# Altium PCB IMX425_MB.PcbDoc
Units mm, origin at the board's own origin, x right, y up, seen from the top; angles counter-clockwise.
Board outline 185 x 150 mm, 2 copper layers (Top Layer, Bottom Layer); 74 components, 34 nets, 348 pads, 590 vias.
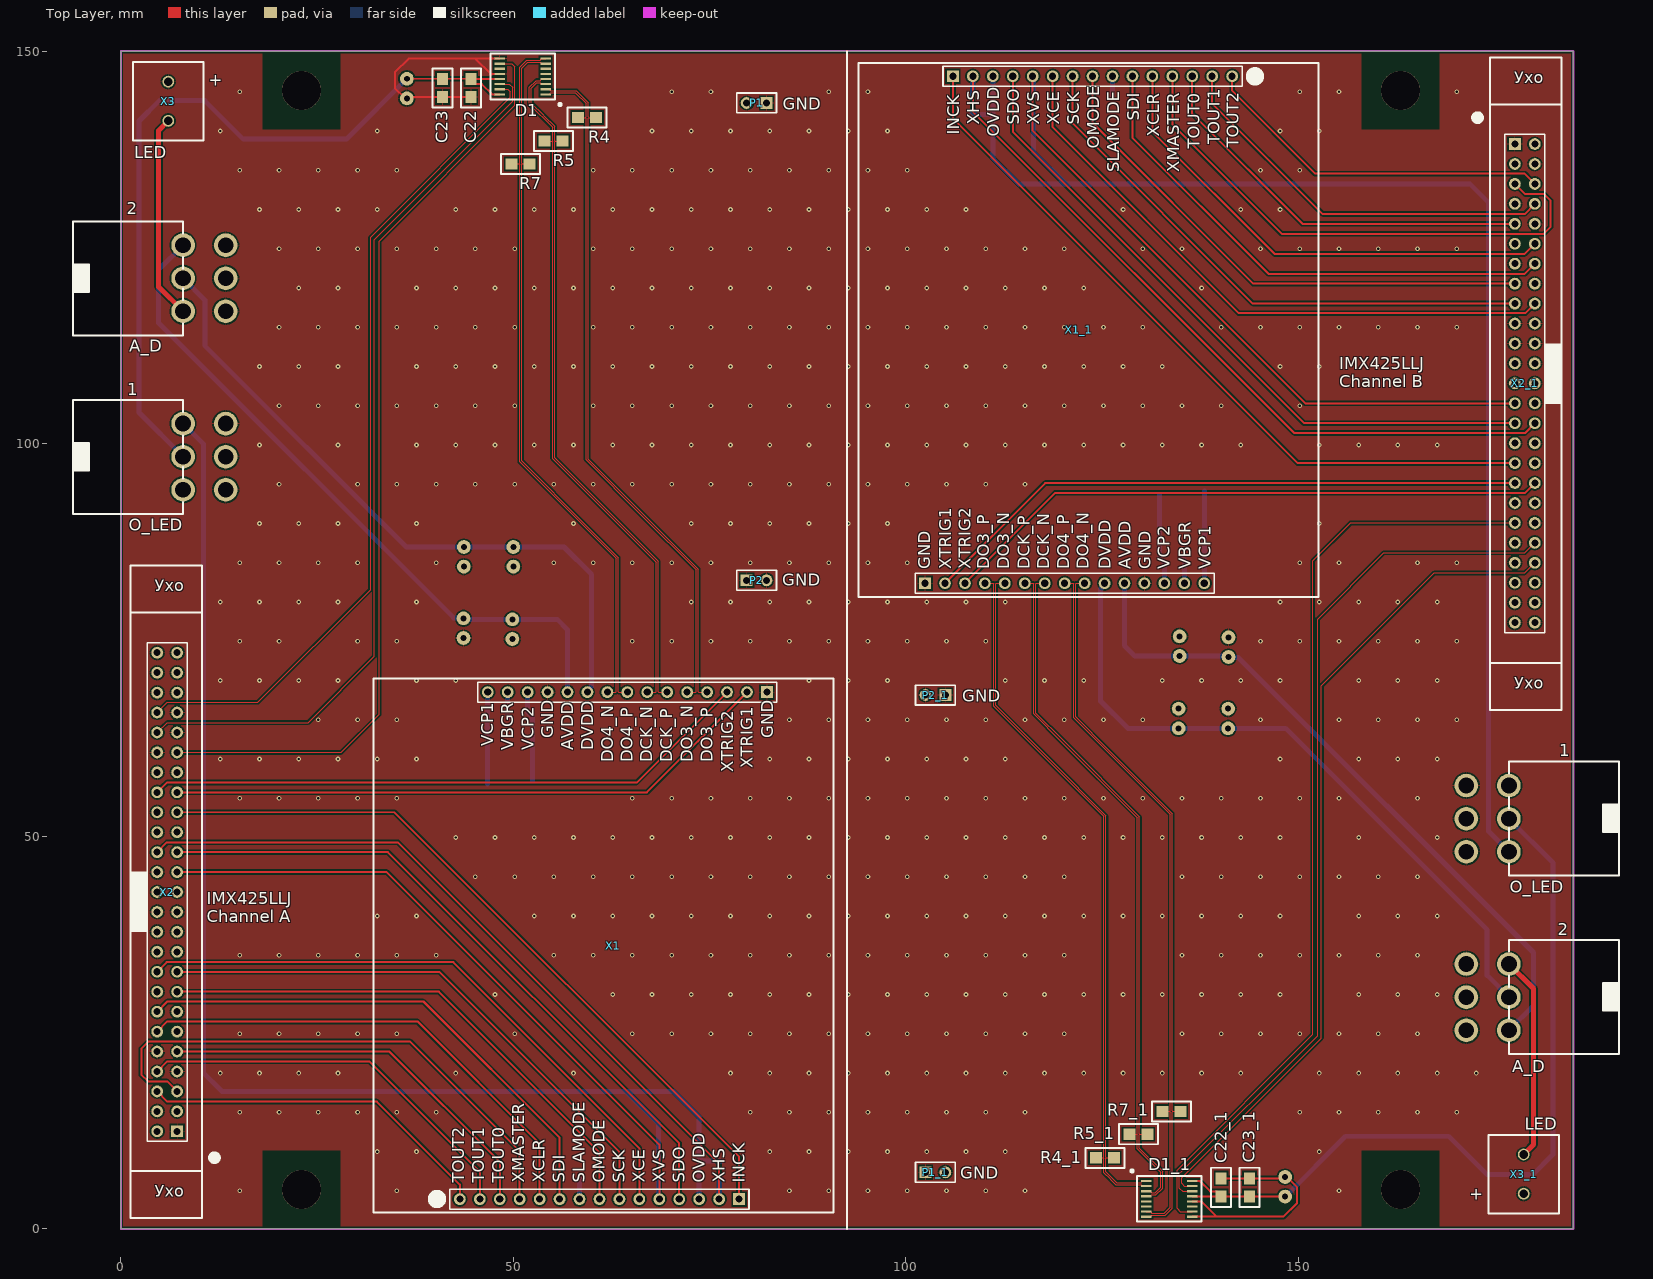
[diagram p0: Top Layer view]
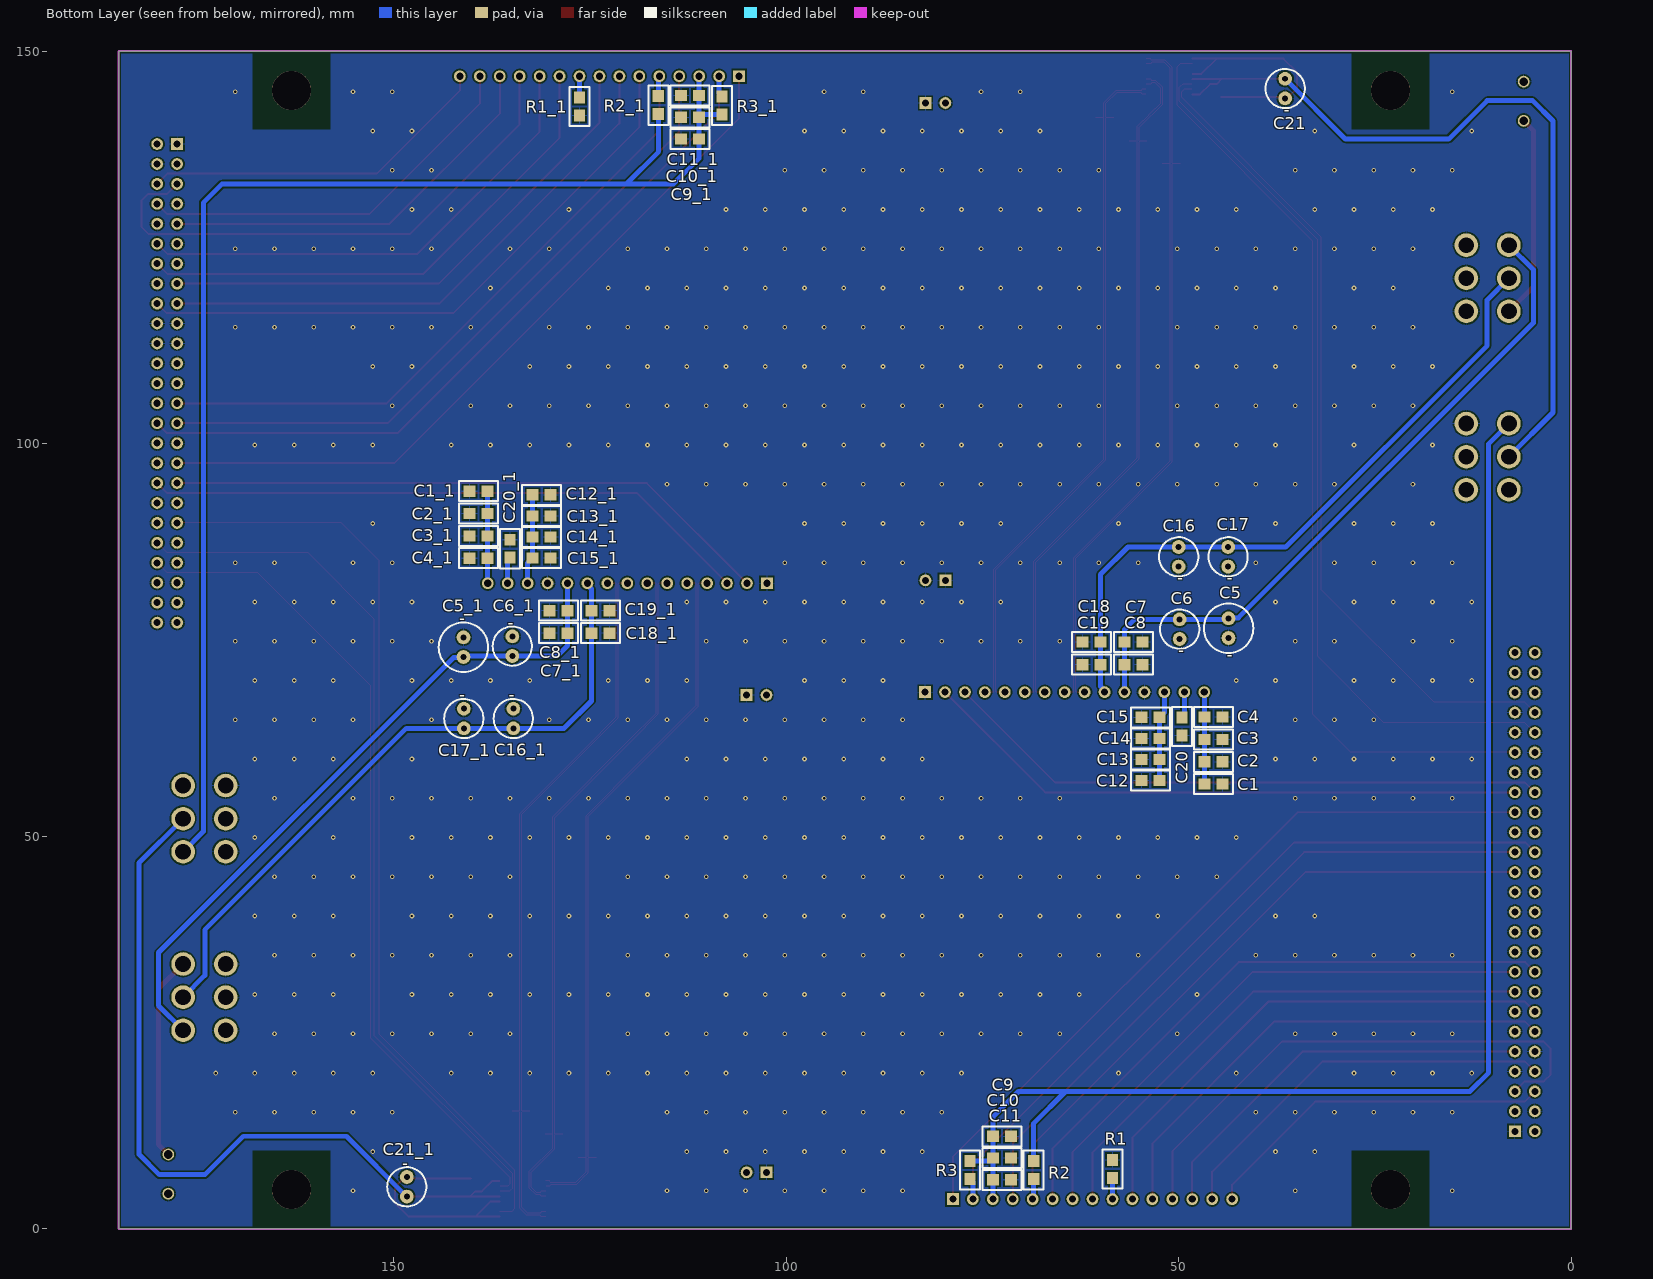
[diagram p1: Bottom Layer view, seen from below]

## Layer stack, top to bottom
Top Solder: solder mask 0.0102, Solder Resist, Dk 3.5
Top Layer: signal copper 0.0356
Dielectric 1: dielectric 0.32, FR-4, Dk 4.8
Bottom Layer: signal copper 0.0356
Bottom Solder: solder mask 0.0102, Solder Resist, Dk 3.5

## Board outline
0,0 0,150 185,150 185,0

## Design rules (kind name [scope] priority, off if disabled: settings)
BoardOutlineClearance [OnLayer('Multi-Layer')] p1: gap=0.254 ignorepadtopadclearanceinfootprint=FALSE except(0: Arc-SplitContinuation Track-SplitContinuation SMDPad-SplitContinuation THPad-SplitContinuation Via-SplitContinuation Fill-SplitContinuation Poly-SplitContinuation Region-SplitContinuation Text-SplitContinuation; 0.4: Arc-OutlineEdge Track-OutlineEdge SMDPad-OutlineEdge THPad-OutlineEdge Via-OutlineEdge Fill-OutlineEdge Poly-OutlineEdge Region-OutlineEdge Text-OutlineEdge)
Clearance [All] p1: gap=0.125 ignorepadtopadclearanceinfootprint=FALSE except(0.2: Arc-Fill Arc-Poly Track-Fill Track-Poly SMDPad-Fill SMDPad-Poly THPad-Fill THPad-Poly Via-Fill Via-Poly Fill-Fill Fill-Poly Poly-Poly Poly-Region Poly-Text; 0.25: Arc-Hole Track-Hole SMDPad-Hole THPad-Hole Via-Hole Fill-Hole Poly-Hole Region-Hole Text-Hole) // Standart
DiffPairsRouting [All] p1: maxlimit=0.254 minlimit=0.127 mostfreqgap=0.13 toplayer_minwidth=0.127 toplayer_maxwidth=0.381 toplayer_prefwidth=0.37 bottomlayer_minwidth=0.127 bottomlayer_maxwidth=0.381 bottomlayer_prefwidth=0.37 maxuncoupledlength=12.7
HoleSize [All] p1: absolutevalues=TRUE maxlimit=5 minlimit=0.3 maxpercent=80.000 minpercent=20.000
MinimumSolderMaskSliver [All] p1: minsoldermaskwidth=0.1
PlaneClearance "PlaneClearance-1 1/2 Oz" [All] p1: clearance=0.2 // Standart
PlaneConnect "TermalConnect-1 1/2 Oz" [All] p1: planeconnectstyle=Relief reliefexpansion=0.2 reliefentries=4 reliefconductorwidth=0.2 reliefairgap=0.2 // Standart
PolygonConnect "PolygonConnect-1 1/2 Oz" [All] p1: thpad.connectstyle=Relief thpad.reliefconductorwidth=0.15 thpad.reliefentries=4 thpad.polygonreliefangle="90 Angle" thpad.airgapwidth=0.2 smdpad.connectstyle=Relief smdpad.reliefconductorwidth=0.2 smdpad.reliefentries=4 smdpad.polygonreliefangle="90 Angle" smdpad.airgapwidth=0.2 via.connectstyle=Direct via.reliefconductorwidth=0.254 via.reliefentries=4 via.polygonreliefangle="90 Angle" via.airgapwidth=0.254 // Standart
RoutingVias [All] p1: holewidth=0.3 width=1.27 viastyle="Through Hole" minholewidth=0.3 minwidth=0.6 maxholewidth=0.711 maxwidth=1.27
SilkToSilkClearance [All] p1: silktosilkclearance=0
SilkToSolderMaskClearance [IsPad] p1: minsilkscreentomaskgap=0 clearancetoexposedcopper=TRUE
SolderMaskExpansion [All] p1: expansion=0.102 istentingtop=FALSE
UnRoutedNet [All] p1: checkbadconnections=TRUE
Width [All] p1: maxlimit=2.5 minlimit=0.125 preferedwidth=0.37
22 further rules are at their usual default settings.

## Classes and differential pairs
component class IMX425_MB: 1 2 C1 C2 C3 C4 C5 C6 C7 C8 C9 C10 C11 C12 C13 C14 C15 C16 C17 C18 C19 C20 C21 C22 C23 D1 P1 P2 R1 R2 R3 R4 R5 R7 X1 X2 X3
differential pair DO4: +DO4_P -DO4_N
differential pair DO3: +DO3_P -DO3_N
differential pair DCK: +DCK_P -DCK_N

## Components (designator, comment, footprint, x,y, rotation, side; value= is the part's Value field where it differs from the comment)
1 "O_LED" POWER 176.797,48.028 r270 top
1 "O_LED" POWER 7.925,102.565 r90 top
2 "A_D" POWER 176.797,25.295 r270 top
2 "A_D" POWER 7.925,125.298 r90 top
C1 "4,7 мкФ" CAP_SMALL 48.057,55.372 r180 bottom
C1_1 "4,7 мкФ" CAP_SMALL 136.665,95.221 r0 bottom (schematic designator C1)
C2 "4,7 мкФ" CAP_SMALL 48.057,58.217 r180 bottom
C2_1 "4,7 мкФ" CAP_SMALL 136.665,92.376 r0 bottom (schematic designator C2)
C3 "4,7 мкФ" CAP_SMALL 48.057,61.062 r180 bottom
C3_1 "4,7 мкФ" CAP_SMALL 136.665,89.531 r0 bottom (schematic designator C3)
C4 "4,7 мкФ" CAP_SMALL 48.057,63.906 r180 bottom
C4_1 "4,7 мкФ" CAP_SMALL 136.665,86.686 r0 bottom (schematic designator C4)
C5 "100 мкФ" Cap_0612_electrolitic 43.637,76.505 r270 bottom
C5_1 "100 мкФ" Cap_0612_electrolitic 141.085,74.088 r90 bottom (schematic designator C5)
C6 "22 мкФ" Cap_0511_electrolitic 49.86,76.378 r270 bottom
C6_1 "22 мкФ" Cap_0511_electrolitic 134.862,74.215 r90 bottom (schematic designator C6)
C7 "0,1 мкФ" CAP_SMALL 58.242,73.457 r180 bottom
C7_1 "0,1 мкФ" CAP_SMALL 126.48,77.136 r0 bottom (schematic designator C7)
C8 "0,01 мкФ" CAP_SMALL 58.242,70.587 r180 bottom
C8_1 "0,01 мкФ" CAP_SMALL 126.48,80.006 r0 bottom (schematic designator C8)
C9 "1 мкФ" CAP_SMALL 75.006,10.516 r180 bottom
C9_1 "1 мкФ" CAP_SMALL 109.716,140.077 r0 bottom (schematic designator C9)
C10 "0,1 мкФ" CAP_SMALL 75.006,7.747 r180 bottom
C10_1 "0,1 мкФ" CAP_SMALL 109.716,142.846 r0 bottom (schematic designator C10)
C11 "0,01 мкФ" CAP_SMALL 75.006,4.978 r180 bottom
C11_1 "0,01 мкФ" CAP_SMALL 109.716,145.614 r0 bottom (schematic designator C11)
C12 "4,7 мкФ" CAP_SMALL 51.079,58.369 r0 bottom
C12_1 "4,7 мкФ" CAP_SMALL 133.642,92.224 r180 bottom (schematic designator C12)
C13 "4,7 мкФ" CAP_SMALL 51.079,61.053 r0 bottom
C13_1 "4,7 мкФ" CAP_SMALL 133.642,89.54 r180 bottom (schematic designator C13)
C14 "4,7 мкФ" CAP_SMALL 51.079,63.737 r0 bottom
C14_1 "4,7 мкФ" CAP_SMALL 133.642,86.856 r180 bottom (schematic designator C14)
C15 "4,7 мкФ" CAP_SMALL 51.079,66.421 r0 bottom
C15_1 "4,7 мкФ" CAP_SMALL 133.642,84.172 r180 bottom (schematic designator C15)
C16 "22 мкФ" Cap_0511_electrolitic 49.987,85.598 r270 bottom
C16_1 "22 мкФ" Cap_0511_electrolitic 134.735,64.995 r90 bottom (schematic designator C16)
C17 "22 мкФ" Cap_0511_electrolitic 43.688,85.598 r270 bottom
C17_1 "22 мкФ" Cap_0511_electrolitic 141.034,64.995 r90 bottom (schematic designator C17)
C18 "0,1 мкФ" CAP_SMALL 58.572,75.997 r0 bottom
C18_1 "0,1 мкФ" CAP_SMALL 126.149,74.596 r180 bottom (schematic designator C18)
C19 "0,01 мкФ" CAP_SMALL 58.572,73.127 r0 bottom
C19_1 "0,01 мкФ" CAP_SMALL 126.149,77.466 r180 bottom (schematic designator C19)
C20 "0,22 мкФ" CAP_SMALL 50.851,66.472 r270 bottom
C20_1 "0,22 мкФ" CAP_SMALL 133.871,84.121 r90 bottom (schematic designator C20)
C21 "22 мкФ" Cap_0511_electrolitic 36.424,145.237 r270 bottom
C21_1 "22 мкФ" Cap_0511_electrolitic 148.298,5.356 r90 bottom (schematic designator C21)
C22 "0,1 мкФ" CAP_SMALL 45.847,142.799 r90 top
C22_1 "0,1 мкФ" CAP_SMALL 138.875,7.794 r270 top (schematic designator C22)
C23 "0,01 мкФ" CAP_SMALL 42.24,142.799 r90 top
C23_1 "0,01 мкФ" CAP_SMALL 142.482,7.794 r270 top (schematic designator C23)
D1 "SN65LVDS048A" "SN65LVDS048A (4LVDS)" 54.1,144.5 r90 top
D1_1 "SN65LVDS048A" "SN65LVDS048A (4LVDS)" 130.622,6.093 r270 top (schematic designator D1)
P1 "GND" HDR1X2 82.24,143.4 r180 top
P1_1 "GND" HDR1X2 102.482,7.193 r0 top (schematic designator P1)
P2 "GND" HDR1X2 79.7,82.6 r0 top
P2_1 "GND" HDR1X2 105.022,67.993 r180 top (schematic designator P2)
R1 "10к" RES 59.665,5.156 r180 bottom
R1_1 "10к" RES 125.057,145.437 r0 bottom (schematic designator R1)
R2 "10к" RES 67.208,9.957 r0 bottom
R2_1 "10к" RES 117.513,140.636 r180 bottom (schematic designator R2)
R3 "10к" RES 75.311,9.982 r0 bottom
R3_1 "10к" RES 109.411,140.611 r180 bottom (schematic designator R3)
R4 "100" RES 56.9,142.789 r270 top
R4_1 "100" RES 127.822,7.804 r90 top (schematic designator R4)
R5 "100" RES 57.6,137.3 r90 top
R5_1 "100" RES 127.122,13.293 r270 top (schematic designator R5)
R7 "100" RES 53.4,134.4 r90 top
R7_1 "100" RES 131.322,16.193 r270 top (schematic designator R7)
X1 "IMX425LLJ" IMX425LLJ_MEZ 43.18,3.785 r90 top
X1_1 "IMX425LLJ" IMX425LLJ_MEZ 141.542,146.808 r270 top (schematic designator X1)
X2 "IDC_7953" IDC_7953 7.163,12.421 r90 top
X2_1 "IDC_7953" IDC_7953 177.559,138.172 r270 top (schematic designator X2)
X3 "LED" KLEMMNIK_2 6.045,141.122 r90 top
X3_1 "LED" KLEMMNIK_2 178.677,9.47 r270 top (schematic designator X3)

## Footprints (in the part's own frame and the unit in brackets; to place one, negate y for a bottom-side part, rotate by r counter-clockwise, add the part's x,y. Pads: shape width x height; smd on the part's side, far side on the other; paste and mask are expansions set on the pad)
Cap_0511_electrolitic [mm]
  round 1.75 hole 0.762: 1(-1.25,0) 2(1.25,0)
  silkscreen extent -2.5,-2.5 2.5,2.5
Cap_0612_electrolitic [mm]
  round 1.75 hole 0.762: 1(-1.25,0) 2(1.25,0)
  silkscreen extent -3.15,-3.15 3.15,3.15
CAP_SMALL [mil] "FROM_MAX"
  rect 60x55.98 smd: 1(53.71,50) 2(143.71,50)
  silkscreen extent 1,0 197,100, body extent 20,18 178,82, height 100
HDR1X2 [mm] "Connector; Header; 2 Position"
  rect 1.5x1.5 hole 0.9: 1(0,0)
  round 1.5 hole 0.9: 2(2.54,0)
  silkscreen extent -1.27,-1.27 3.81,1.27
IDC_7953 [mm]
  rect 1.5x1.5 hole 0.9: 1(0,0)
  round 1.5 hole 0.9: 2(0,2.54) 3(2.54,0) 4(2.54,2.54) 5(5.08,0) 6(5.08,2.54) 7(7.62,0) 8(7.62,2.54) 9(10.16,0) 10(10.16,2.54) 11(12.7,0) 12(12.7,2.54) 13(15.24,0) 14(15.24,2.54) 15(17.78,0) 16(17.78,2.54) 17(20.32,0) 18(20.32,2.54) 19(22.86,0) 20(22.86,2.54) 21(25.4,0) 22(25.4,2.54) 23(27.94,0) 24(27.94,2.54) 25(30.48,0) 26(30.48,2.54) 27(33.02,0) 28(33.02,2.54) 29(35.56,0) 30(35.56,2.54) 31(38.1,0) 32(38.1,2.54) 33(40.64,0) 34(40.64,2.54) 35(43.18,0) 36(43.18,2.54) 37(45.72,0) 38(45.72,2.54) 39(48.26,0) 40(48.26,2.54) 41(50.8,0) 42(50.8,2.54) 43(53.34,0) 44(53.34,2.54) 45(55.88,0) 46(55.88,2.54) 47(58.42,0) 48(58.42,2.54) 49(60.96,0) 50(60.96,2.54)
  silkscreen extent -11.03,-5.14 72.07,5.92
IMX425LLJ_MEZ [mm]
  round 1.5 hole 0.9: 1(0,0) 2(0,-2.54) 3(0,-5.08) 4(0,-7.62) 5(0,-10.16) 6(0,-12.7) 7(0,-15.24) 8(0,-17.78) 9(0,-20.32) 10(0,-22.86) 11(0,-25.4) 12(0,-27.94) 13(0,-30.48) 14(0,-33.02) 17(64.58,-36.568) 18(64.58,-34.028) 19(64.58,-31.488) 20(64.58,-28.948) 21(64.58,-26.408) 22(64.58,-23.868) 23(64.58,-21.328) 24(64.58,-18.788) 25(64.58,-16.248) 26(64.58,-13.708) 27(64.58,-11.168) 28(64.58,-8.628) 29(64.58,-6.088) 30(64.58,-3.548)
  rect 1.5x1.5 hole 0.9: 15(0,-35.56) 16(64.58,-39.108)
  silkscreen extent -1.7,-47.6 66.3,11
KLEMMNIK_2 [mm]
  round 1.5 hole 1.1: 1(0,0) 2(5,0)
  silkscreen extent -2.5,-4.5 7.5,4.5
POWER [mm] "POWER"
  round 3 hole 2: 1(0,0) 2(-4.217,0) 3(-8.435,0) 4(-8.435,-5.422) 5(-4.217,-5.422) 6(0,-5.422)
  silkscreen extent -11.5,0 3,14
RES [mil] "FROM_MAX"
  rect 55.98x60 smd: 1(49,52.71) 2(49,142.71)
  silkscreen extent -1,0 99,196, body extent 17,19 81,177, height 100
"SN65LVDS048A (4LVDS)" [mm]
  rect 0.28x1.35 smd: 1(0,0) 2(0.65,0) 3(1.3,0) 4(1.95,0) 5(2.6,0) 6(3.25,0) 7(3.9,0) 8(4.55,0) 9(4.55,5.85) 10(3.9,5.85) 11(3.25,5.85) 12(2.6,5.85) 13(1.95,5.85) 14(1.3,5.85) 15(0.65,5.85) 16(0,5.85)
  silkscreen extent -1.49,-2.03 5.18,7

## Part data
1 1 2 2: library part POWER
C1 C1_1 C2 C2_1 C3 C3_1 C4 C4_1 C7 C7_1 C8 C8_1 C9 C9_1 C10 C10_1 C11 C11_1 C12 C12_1 C13 C13_1 C14 C14_1 C15 C15_1 C18 C18_1 C19 C19_1 C20 C20_1 C22 C22_1 C23 C23_1: library part CAP_SMALL
C5 C5_1: library part Cap_electrolotoc_0612
C6 C6_1 C16 C16_1 C17 C17_1 C21 C21_1: library part Cap_electrolotoc_0511
D1 D1_1: library part "SN65LVDS048A (4LVDS)"
P1 P1_1 P2 P2_1: library part "Header 2", "Header, 2-Pin", LatestRevisionDate=17-Jul-2002, LatestRevisionNote="Re-released for DXP Platform.", Publisher="Altium Limited"
R1 R1_1 R2 R2_1 R3 R3_1 R4 R4_1 R5 R5_1 R7 R7_1: library part RES
X1 X1_1: library part IMX425LLJ_MEZ
X3 X3_1: library part KLEMMNIK_2

## Free pads (board coordinates)
  round 5 hole 5 unplated: H(23,5) H(23,145) H(163,5) H(163,145)

## Via types
v1: diameter 0.6, hole 0.3, Top Layer to Bottom Layer, 590 vias

## Nets (pads, with @x,y where several pads share a name; then routed paths per layer and width w, separated by ;. In a path a pad name is that pad's centre, name@x,y a point inside that pad or via, vN(x,y) a via of type N, cw(c..) or ccw(c..) an arc to the next point about the centre after c; other vN are vias at no path point)
3,3V_LVDS: 1.2@7.925,98.348 C21.1 C22.2 C23.2 D1.13 D1.16 | length 101.8
  Top Layer w0.254: C21.1 44.539,146.487 C22.2 ; D1.16 47.3,144.5 45.986,145.814 45.161,145.814 44.577,146.398 C22.2 ; D1.13 48.249,146.449 C22.2
  Bottom Layer w0.635: 1.2@7.925,98.348 2.3,103.973 2.3,141.1 4.9,143.7 10.7,143.7 15.6,138.8 28.736,138.8 C21.1
AVDD: 2.1@7.925,125.298 C5.1 C6.1 C7.1 C8.1 X1.26 | length 87.4
  Bottom Layer w0.635: 2.1@7.925,125.298 4.8,122.173 4.8,115.4 42.384,77.816 43.576,77.816 43.764,77.628 C6.1 55.572,77.628 56.878,76.322 C7.1 C8.1 56.878,68.374 X1.26
DCK: D1.14 X2.42 | length 113.3
  Top Layer w0.127: X2.42 5.893,64.491 23.851,64.491 32.3,72.94 32.3,126 49.9,143.6 49.9,145.4 49.5,145.8 D1.14
DCK_N: D1.4 R5.2 X1.22 | length 88.3
  Top Layer w0.127: R5.2 54.915,138.545 ; D1.4 53.565,146.45 53.488,146.373 53.488,146.328 53.414,146.253 52.89,146.253 52.043,145.406 52.043,143.257 54.99,140.31 54.99,138.619 54.915,138.545 ; X1.22 68.115,68.364 68.19,68.439 68.19,84.911 64.709,88.391 54.99,98.11 54.99,138.47 54.915,138.545
DCK_P: D1.3 R5.1 X1.21 | length 87.9
  Top Layer w0.127: D1.3 53.565,145.8 53.488,145.877 53.488,145.922 53.414,145.996 52.996,145.996 52.3,145.3 52.3,143.363 53.791,141.873 53.882,141.782 55.247,140.417 55.247,138.619 55.321,138.545 ; R5.1 55.321,138.545 ; X1.21 68.521,68.364 68.447,68.439 68.447,85.017 64.982,88.482 55.247,98.217 55.247,138.47 55.321,138.545
DO3: D1.15 X2.44 | length 105.9
  Top Layer w0.127: X2.44@4.61,65.773 5.893,67.056 17.449,67.056 31.8,81.407 31.8,126.3 49.6,144.1 49.6,144.8 49.25,145.15 D1.15
DO3_N: D1.1 R4.1 X1.20 | length 88.7
  Top Layer w0.127: D1.1 54.635,144.5 54.712,144.577 54.712,144.622 54.786,144.697 57.904,144.697 59.253,143.347 59.253,141.619 59.179,141.545 ; R4.1 59.179,141.545 ; X1.20 73.195,68.364 73.27,68.439 73.27,83.931 66.309,90.891 59.253,97.947 59.253,141.47 59.179,141.545
DO3_P: D1.2 R4.2 X1.19 | length 89.1
  Top Layer w0.127: D1.2 54.635,145.15 54.711,145.073 54.711,145.028 54.786,144.954 58.01,144.954 58.691,144.273 58.782,144.182 59.51,143.453 59.51,141.619 59.585,141.545 ; R4.2 59.585,141.545 ; X1.19 73.601,68.364 73.527,68.439 73.527,84.037 66.582,90.982 59.51,98.053 59.51,141.47 59.585,141.545
DO4: D1.10 X2.39 | length 119.5
  Top Layer w0.127: X2.39 28.067,60.681 32.9,65.514 32.9,125.8 50.2,143.1 50.2,148 49.8,148.4 D1.10
DO4_N: D1.8 R7.2 X1.24 | length 90.6
  Top Layer w0.127: R7.2 50.715,135.645 ; D1.8 53.565,149.05 53.489,148.974 53.489,148.928 53.414,148.854 51.69,148.854 50.79,147.953 50.79,141.044 50.79,135.719 50.715,135.645 ; X1.24 63.035,68.364 63.11,68.439 63.11,85.391 59.009,89.491 50.79,97.71 50.79,135.57 50.715,135.645
DO4_P: D1.7 R7.1 X1.23 | length 90.2
  Top Layer w0.127: R7.1 51.121,135.645 ; D1.7 53.565,148.4 53.488,148.477 53.488,148.522 53.414,148.597 51.796,148.597 51.047,147.847 51.047,141.15 51.047,135.719 51.121,135.645 ; X1.23 63.441,68.364 63.367,68.439 63.367,85.497 59.282,89.582 51.047,97.817 51.047,135.57 51.121,135.645
DVDD: 2.2@7.925,121.081 C16.1 C17.1 C18.1 C19.1 X1.25 | length 86.2
  Bottom Layer w0.635: 2.2@7.925,121.081 10.7,118.306 10.7,112.5 36.352,86.848 C17.1 C16.1 56.452,86.848 59.937,83.363 C19.1 59.937,69.107 59.428,68.598 X1.25
GND: 1.4 1.5 1.6 2.4 2.5 2.6 C1.2 C1_1.2 C2.2 C2_1.2 C3.2 C3_1.2 C4.2 C4_1.2 C5.2 C5_1.2 C6.2 C6_1.2 C7.2 C7_1.2 C8.2 C8_1.2 C9.2 C9_1.2 C10.2 C10_1.2 C11.2 C11_1.2 C12.2 C12_1.2 C13.2 C13_1.2 C14.2 C14_1.2 C15.2 C15_1.2 C16.2 C16_1.2 C17.2 C17_1.2 C18.2 C18_1.2 C19.2 C19_1.2 C20.2 C20_1.2 C21.2 C21_1.2 C22.1 C23.1 D1.9 D1.12 P1.1 P1.2 P1_1.1 P1_1.2 P2.1 P2.2 P2_1.1 P2_1.2 R1.2 R1_1.2 X1.16 X1.27 X1_1.16 X1_1.27 X2.1 X2.4 X2.7 X2.10 X2.11 X2.13 X2.16 X2.19 X2.20 X2.21 X2.22 X2.23 X2.24 X2.25 X2.26 X2.28 X2.31 X2.32 X2.34 X2.37 X2.38 X2.40 X2.41 X2.43 X2.45 X2.46 X2.47 X2.48 X2.49 X2.50 X2_1.1 X2_1.4 X2_1.7 X2_1.10 X2_1.11 X2_1.13 X2_1.16 X2_1.19 X2_1.20 X2_1.21 X2_1.22 X2_1.23 X2_1.24 X2_1.25 X2_1.26 X2_1.28 X2_1.31 X2_1.32 X2_1.34 X2_1.37 X2_1.38 X2_1.40 X2_1.41 X2_1.43 X2_1.45 X2_1.46 X2_1.47 X2_1.48 X2_1.49 X2_1.50 X3.2 X3_1.2 | length 30.3
  Top Layer w0.254: C22.1 C23.1 36.599,144.163 C21.2 36.213,143.987 34.9,145.3 34.9,147.3 36.65,149.05 45.15,149.05 ; D1.12 47.1,147.1 45.15,149.05 ; D1.9 45.15,149.05
  other v1: 15.153,4.839 35.153,4.839 85.153,4.839 90.153,4.839 95.153,4.839 100.153,4.839 105.153,4.839 110.153,4.839 115.153,4.839 155.153,4.839 32.653,9.839 37.653,9.839 82.653,9.839 87.653,9.839 92.653,9.839 97.653,9.839 102.653,9.839 107.653,9.839 112.653,9.839 152.653,9.839 15.153,14.839 20.153,14.839 25.153,14.839 30.153,14.839 35.153,14.839 40.153,14.839 80.153,14.839 85.153,14.839 90.153,14.839 95.153,14.839 100.153,14.839 105.153,14.839 110.153,14.839 115.153,14.839 150.153,14.839 155.153,14.839 160.153,14.839 165.153,14.839 170.153,14.839 12.653,19.839 17.653,19.839 22.653,19.839 27.653,19.839 42.653,19.839 57.653,19.839 77.653,19.839 82.653,19.839 87.653,19.839 92.653,19.839 97.653,19.839 102.653,19.839 107.653,19.839 112.653,19.839 117.653,19.839 122.653,19.839 127.653,19.839 132.653,19.839 137.653,19.839 142.653,19.839 152.653,19.839 157.653,19.839 162.653,19.839 167.653,19.839 172.653,19.839 15.153,24.839 20.153,24.839 25.153,24.839 30.153,24.839 35.153,24.839 50.153,24.839 65.153,24.839 70.153,24.839 75.153,24.839 80.153,24.839 85.153,24.839 90.153,24.839 95.153,24.839 100.153,24.839 105.153,24.839 110.153,24.839 115.153,24.839 120.153,24.839 135.153,24.839 140.153,24.839 145.153,24.839 150.153,24.839 155.153,24.839 160.153,24.839 165.153,24.839 47.653,29.839 62.653,29.839 67.653,29.839 72.653,29.839 77.653,29.839 82.653,29.839 87.653,29.839 92.653,29.839 97.653,29.839 102.653,29.839 107.653,29.839 112.653,29.839 117.653,29.839 122.653,29.839 127.653,29.839 132.653,29.839 137.653,29.839 142.653,29.839 147.653,29.839 157.653,29.839 162.653,29.839 167.653,29.839 15.153,34.839 20.153,34.839 25.153,34.839 30.153,34.839 35.153,34.839 40.153,34.839 55.153,34.839 60.153,34.839 65.153,34.839 70.153,34.839 75.153,34.839 80.153,34.839 85.153,34.839 90.153,34.839 95.153,34.839 100.153,34.839 105.153,34.839 110.153,34.839 115.153,34.839 120.153,34.839 135.153,34.839 140.153,34.839 145.153,34.839 150.153,34.839 155.153,34.839 160.153,34.839 165.153,34.839 32.653,39.839 37.653,39.839 52.653,39.839 57.653,39.839 62.653,39.839 67.653,39.839 72.653,39.839 77.653,39.839 82.653,39.839 87.653,39.839 92.653,39.839 97.653,39.839 102.653,39.839 107.653,39.839 112.653,39.839 117.653,39.839 122.653,39.839 127.653,39.839 132.653,39.839 137.653,39.839 142.653,39.839 147.653,39.839 157.653,39.839 162.653,39.839 167.653,39.839 45.153,44.839 50.153,44.839 55.153,44.839 60.153,44.839 65.153,44.839 70.153,44.839 75.153,44.839 80.153,44.839 85.153,44.839 90.153,44.839 95.153,44.839 100.153,44.839 105.153,44.839 110.153,44.839 115.153,44.839 120.153,44.839 135.153,44.839 140.153,44.839 145.153,44.839 150.153,44.839 155.153,44.839 160.153,44.839 165.153,44.839 42.653,49.839 47.653,49.839 52.653,49.839 57.653,49.839 62.653,49.839 67.653,49.839 72.653,49.839 77.653,49.839 82.653,49.839 87.653,49.839 92.653,49.839 97.653,49.839 102.653,49.839 107.653,49.839 112.653,49.839 117.653,49.839 122.653,49.839 127.653,49.839 132.653,49.839 137.653,49.839 142.653,49.839 147.653,49.839 157.653,49.839 167.653,49.839 15.153,54.839 20.153,54.839 25.153,54.839 30.153,54.839 35.153,54.839 65.153,54.839 70.153,54.839 75.153,54.839 80.153,54.839 85.153,54.839 90.153,54.839 95.153,54.839 100.153,54.839 105.153,54.839 110.153,54.839 115.153,54.839 120.153,54.839 125.153,54.839 130.153,54.839 135.153,54.839 140.153,54.839 145.153,54.839 150.153,54.839 155.153,54.839 165.153,54.839 12.653,59.839 17.653,59.839 22.653,59.839 27.653,59.839 32.653,59.839 37.653,59.839 82.653,59.839 87.653,59.839 92.653,59.839 97.653,59.839 102.653,59.839 107.653,59.839 112.653,59.839 147.653,59.839 157.653,59.839 162.653,59.839 167.653,59.839 25.153,64.839 30.153,64.839 35.153,64.839 85.153,64.839 90.153,64.839 95.153,64.839 100.153,64.839 105.153,64.839 110.153,64.839 115.153,64.839 120.153,64.839 125.153,64.839 130.153,64.839 145.153,64.839 155.153,64.839 160.153,64.839 165.153,64.839 170.153,64.839 12.653,69.839 17.653,69.839 22.653,69.839 27.653,69.839 37.653,69.839 42.653,69.839 87.653,69.839 92.653,69.839 97.653,69.839 112.653,69.839 117.653,69.839 122.653,69.839 132.653,69.839 137.653,69.839 142.653,69.839 147.653,69.839 157.653,69.839 162.653,69.839 167.653,69.839 15.153,74.839 20.153,74.839 30.153,74.839 35.153,74.839 65.153,74.839 70.153,74.839 75.153,74.839 80.153,74.839 85.153,74.839 90.153,74.839 95.153,74.839 100.153,74.839 105.153,74.839 110.153,74.839 145.153,74.839 150.153,74.839 155.153,74.839 160.153,74.839 165.153,74.839 170.153,74.839 12.653,79.839 17.653,79.839 22.653,79.839 27.653,79.839 37.653,79.839 72.653,79.839 77.653,79.839 82.653,79.839 87.653,79.839 92.653,79.839 97.653,79.839 102.653,79.839 107.653,79.839 112.653,79.839 147.653,79.839 152.653,79.839 157.653,79.839 162.653,79.839 167.653,79.839 15.153,84.839 20.153,84.839 25.153,84.839 30.153,84.839 40.153,84.839 55.153,84.839 60.153,84.839 65.153,84.839 70.153,84.839 75.153,84.839 80.153,84.839 85.153,84.839 90.153,84.839 95.153,84.839 100.153,84.839 150.153,84.839 155.153,84.839 165.153,84.839 170.153,84.839 17.653,89.839 22.653,89.839 27.653,89.839 37.653,89.839 57.653,89.839 72.653,89.839 77.653,89.839 82.653,89.839 87.653,89.839 92.653,89.839 97.653,89.839 152.653,89.839 20.153,94.839 30.153,94.839 35.153,94.839 40.153,94.839 45.153,94.839 50.153,94.839 55.153,94.839 60.153,94.839 65.153,94.839 70.153,94.839 75.153,94.839 80.153,94.839 85.153,94.839 90.153,94.839 95.153,94.839 100.153,94.839 105.153,94.839 110.153,94.839 115.153,94.839 17.653,99.839 27.653,99.839 37.653,99.839 42.653,99.839 47.653,99.839 52.653,99.839 57.653,99.839 62.653,99.839 67.653,99.839 72.653,99.839 77.653,99.839 82.653,99.839 87.653,99.839 92.653,99.839 97.653,99.839 102.653,99.839 107.653,99.839 112.653,99.839 117.653,99.839 122.653,99.839 127.653,99.839 132.653,99.839 137.653,99.839 142.653,99.839 152.653,99.839 157.653,99.839 162.653,99.839 167.653,99.839 20.153,104.839 25.153,104.839 30.153,104.839 35.153,104.839 40.153,104.839 45.153,104.839 50.153,104.839 60.153,104.839 65.153,104.839 70.153,104.839 75.153,104.839 80.153,104.839 85.153,104.839 90.153,104.839 95.153,104.839 100.153,104.839 105.153,104.839 110.153,104.839 115.153,104.839 120.153,104.839 125.153,104.839 130.153,104.839 135.153,104.839 140.153,104.839 150.153,104.839 17.653,109.839 22.653,109.839 27.653,109.839 37.653,109.839 42.653,109.839 47.653,109.839 52.653,109.839 57.653,109.839 62.653,109.839 67.653,109.839 72.653,109.839 77.653,109.839 82.653,109.839 87.653,109.839 92.653,109.839 97.653,109.839 102.653,109.839 107.653,109.839 112.653,109.839 117.653,109.839 122.653,109.839 127.653,109.839 132.653,109.839 147.653,109.839 152.653,109.839 20.153,114.839 25.153,114.839 30.153,114.839 35.153,114.839 40.153,114.839 45.153,114.839 50.153,114.839 60.153,114.839 65.153,114.839 70.153,114.839 75.153,114.839 80.153,114.839 85.153,114.839 90.153,114.839 95.153,114.839 100.153,114.839 105.153,114.839 110.153,114.839 115.153,114.839 120.153,114.839 125.153,114.839 130.153,114.839 140.153,114.839 145.153,114.839 150.153,114.839 155.153,114.839 160.153,114.839 165.153,114.839 170.153,114.839 22.653,119.839 27.653,119.839 37.653,119.839 42.653,119.839 47.653,119.839 52.653,119.839 57.653,119.839 62.653,119.839 67.653,119.839 72.653,119.839 77.653,119.839 82.653,119.839 87.653,119.839 92.653,119.839 97.653,119.839 102.653,119.839 107.653,119.839 112.653,119.839 117.653,119.839 122.653,119.839 137.653,119.839 20.153,124.839 25.153,124.839 30.153,124.839 35.153,124.839 40.153,124.839 45.153,124.839 50.153,124.839 60.153,124.839 65.153,124.839 70.153,124.839 75.153,124.839 80.153,124.839 85.153,124.839 90.153,124.839 95.153,124.839 100.153,124.839 105.153,124.839 110.153,124.839 115.153,124.839 120.153,124.839 130.153,124.839 135.153,124.839 145.153,124.839 150.153,124.839 155.153,124.839 160.153,124.839 165.153,124.839 170.153,124.839 17.653,129.839 22.653,129.839 27.653,129.839 32.653,129.839 42.653,129.839 47.653,129.839 52.653,129.839 57.653,129.839 62.653,129.839 67.653,129.839 72.653,129.839 77.653,129.839 82.653,129.839 87.653,129.839 92.653,129.839 97.653,129.839 102.653,129.839 107.653,129.839 127.653,129.839 142.653,129.839 147.653,129.839 15.153,134.839 20.153,134.839 25.153,134.839 30.153,134.839 35.153,134.839 60.153,134.839 65.153,134.839 70.153,134.839 75.153,134.839 80.153,134.839 85.153,134.839 90.153,134.839 95.153,134.839 100.153,134.839 145.153,134.839 150.153,134.839 12.653,139.839 32.653,139.839 67.653,139.839 72.653,139.839 77.653,139.839 82.653,139.839 87.653,139.839 92.653,139.839 97.653,139.839 147.653,139.839 152.653,139.839 15.153,144.839 70.153,144.839 75.153,144.839 90.153,144.839 95.153,144.839 150.153,144.839 155.153,144.839 170.153,144.839
INCK: X1.15 X2.33 | length 95.1
  Top Layer w0.254: X2.33 34.839,53.061 78.74,9.16 X1.15
Net2_3: 2.3@7.925,116.863 X3.1 | length 26.1
  Top Layer w0.635: X3.1 4.8,139.877 4.8,119.988 2.3@7.925,116.863
OMODE: X1.8 X2.15 | length 68.2
  Top Layer w0.254: X2.15 40.499,30.201 60.96,9.74 X1.8
OVDD: 1.1@7.925,102.565 C9.1 C10.1 C11.1 R2.1 R3.1 X1.13 | length 173.4
  Bottom Layer w0.635: 1.1@7.925,102.565 10.5,99.99 10.5,19.9 12.9,17.5 64.4,17.5 ; R2.1 68.5,8.665 68.5,13.4 64.4,17.5 ; C10.1 C10.1@73.66,8.999 ; X1.13 C10.1@73.66,8.999 ; R3.1 74.016,8.643 C10.1@73.66,8.999 ; 64.4,17.5 70.4,17.5 73.66,14.24 C10.1@73.66,8.999
SCK: X1.9 X2.17 | length 71.9
  Top Layer w0.254: X2.17 40.559,32.741 63.5,9.8 X1.9
SDI: X1.6 X2.14 | length 66.8
  Top Layer w0.254: X2.14 5.918,28.956 38.544,28.956 55.88,11.62 X1.6
SDO: X1.12 X2.29 | length 86.4
  Top Layer w0.254: X2.29 34.019,47.981 71.12,10.88 X1.12
SLAMODE: R1.1 X1.7 | length 2.7
  Bottom Layer w0.635: X1.7 R1.1
TOUT0: X1.3 X2.9 | length 51.7
  Top Layer w0.254: X2.9 34.219,22.581 48.26,8.54 X1.3
TOUT1: X1.2 X2.8 | length 51
  Top Layer w0.254: X2.8 5.918,21.336 31.664,21.336 45.72,7.28 X1.2
TOUT2: X1.1 X2.6 | length 45.3
  Top Layer w0.254: X2.6 5.918,16.205 32.595,16.205 43.18,5.62 X1.1
VBGR: C20.1 X1.29 | length 3.4
  Bottom Layer w0.635: X1.29 49.268,65.42 C20.1
VCP1: C1.1 C2.1 C3.1 C4.1 X1.30 | length 11.7
  Bottom Layer w0.635: C1.1 C4.1 46.693,68.329 X1.30
VCP2: C12.1 C13.1 C14.1 C15.1 X1.28 | length 11.6
  Bottom Layer w0.635: X1.28 51.808,65.787 51.999,65.595 51.999,65.544 52.393,65.151 C15.1 C12.1
XCE: X1.10 X2.18 | length 78.2
  Top Layer w0.254: X2.18 5.842,33.96 42.34,33.96 66.04,10.26 X1.10
XCLR: X1.5 X2.12 | length 62.8
  Top Layer w0.254: X2.12 5.918,26.416 37.784,26.416 53.34,10.86 X1.5
XHS: R3.2 X1.14 X2.30 | length 96.3
  Top Layer w0.254: X2.30 5.867,49.225 35.275,49.225 76.2,8.3 X1.14
  Bottom Layer w0.635: X1.14 76.2,6.002 R3.2
XMASTER: X1.4 X2.5 | length 69.2
  Top Layer w0.254: X2.5 5.893,18.771 3.48,18.771 2.616,19.634 2.616,22.962 3.505,23.851 36.849,23.851 50.8,9.9 X1.4
XTRIG1: X1.17 X2.35 | length 77.9
  Top Layer w0.254: X2.35 66.984,55.601 X1.17
XTRIG2: X1.18 X2.36 | length 77.9
  Top Layer w0.254: X2.36 5.867,56.845 65.689,56.845 X1.18
XVS: R2.2 X1.11 X2.27 | length 85.3
  Top Layer w0.254: X2.27 33.859,45.441 68.58,10.72 X1.11
  Bottom Layer w0.635: R2.2 68.453,3.912 X1.11
pads on no net: 1.1@176.797,48.028 1.2@176.797,52.245 1.3 2.1@176.797,25.295 2.2@176.797,29.512 2.3@176.797,33.73 C1_1.1 C2_1.1 C3_1.1 C4_1.1 C5_1.1 C6_1.1 C7_1.1 C8_1.1 C9_1.1 C10_1.1 C11_1.1 C12_1.1 C13_1.1 C14_1.1 C15_1.1 C16_1.1 C17_1.1 C18_1.1 C19_1.1 C20_1.1 C21_1.1 C22_1.1 C22_1.2 C23_1.1 C23_1.2 D1.5 D1.6 D1.11 D1_1.1 D1_1.2 D1_1.3 D1_1.4 D1_1.5 D1_1.6 D1_1.7 D1_1.8 D1_1.9 D1_1.10 D1_1.11 D1_1.12 D1_1.13 D1_1.14 D1_1.15 D1_1.16 R1_1.1 R2_1.1 R2_1.2 R3_1.1 R3_1.2 R4_1.1 R4_1.2 R5_1.1 R5_1.2 R7_1.1 R7_1.2 X1_1.1 X1_1.2 X1_1.3 X1_1.4 X1_1.5 X1_1.6 X1_1.7 X1_1.8 X1_1.9 X1_1.10 X1_1.11 X1_1.12 X1_1.13 X1_1.14 X1_1.15 X1_1.17 X1_1.18 X1_1.19 X1_1.20 X1_1.21 X1_1.22 X1_1.23 X1_1.24 X1_1.25 X1_1.26 X1_1.28 X1_1.29 X1_1.30 X2.2 X2.3 X2_1.2 X2_1.3 X2_1.5 X2_1.6 X2_1.8 X2_1.9 X2_1.12 X2_1.14 X2_1.15 X2_1.17 X2_1.18 X2_1.27 X2_1.29 X2_1.30 X2_1.33 X2_1.35 X2_1.36 X2_1.39 X2_1.42 X2_1.44 X3_1.1
copper on no net: | length 2492.1
  Top Layer w0.127: 110.054,82.229 111.121,82.229 111.195,82.154 111.195,66.556 118.14,59.611 125.211,52.54 125.211,9.123 125.137,9.048 ; 112.594,82.229 111.527,82.229 111.452,82.154 111.452,66.662 118.413,59.702 125.468,52.646 125.468,9.123 125.543,9.048 ; 115.134,82.229 116.201,82.229 116.275,82.154 116.275,65.576 119.74,62.111 129.475,52.376 129.475,12.123 129.401,12.048 ; 117.674,82.229 116.607,82.229 116.532,82.154 116.532,65.682 120.013,62.202 129.732,52.482 129.732,12.123 129.806,12.048 ; 120.214,82.229 121.281,82.229 121.355,82.154 121.355,65.096 125.44,61.011 133.675,52.776 133.675,15.023 133.601,14.948 ; 122.754,82.229 121.687,82.229 121.612,82.154 121.612,65.202 125.713,61.102 133.932,52.882 133.932,15.023 134.006,14.948 ; 124.197,9.048 125.137,9.048 ; 126.483,9.048 125.543,9.048 ; 128.461,12.048 129.401,12.048 ; 130.622,1.543 131.157,1.543 131.233,1.619 131.233,1.665 131.308,1.739 133.032,1.739 133.932,2.64 133.932,9.549 133.932,14.874 134.006,14.948 ; 130.622,2.193 131.157,2.193 131.233,2.116 131.233,2.071 131.308,1.996 132.925,1.996 133.675,2.746 133.675,9.443 133.675,14.874 133.601,14.948 ; 130.622,4.143 131.157,4.143 131.233,4.219 131.233,4.265 131.308,4.339 131.832,4.339 132.679,5.186 132.679,7.336 129.732,10.282 129.732,11.974 129.806,12.048 ; 130.622,4.793 131.157,4.793 131.233,4.716 131.233,4.671 131.308,4.596 131.725,4.596 132.422,5.293 132.422,7.229 130.931,8.72 130.84,8.811 129.475,10.176 129.475,11.974 129.401,12.048 ; 130.622,5.443 130.087,5.443 130.01,5.519 130.01,5.565 129.936,5.639 126.712,5.639 126.031,6.32 125.94,6.411 125.211,7.14 125.211,8.974 125.137,9.048 ; 130.622,6.093 130.087,6.093 130.01,6.016 130.01,5.971 129.936,5.896 126.818,5.896 125.468,7.246 125.468,8.974 125.543,9.048 ; 130.747,12.048 129.806,12.048 ; 132.661,14.948 133.601,14.948 ; 134.947,14.948 134.006,14.948 ; 136.472,2.193 134.922,2.193 134.522,2.593 134.522,7.493 151.822,24.793 151.822,85.079 156.655,89.912 177.559,89.912 ; 136.472,4.793 135.222,4.793 134.822,5.193 134.822,6.993 152.422,24.593 152.422,77.653 160.871,86.102 178.829,86.102 180.099,87.372 ; 136.472,5.443 135.472,5.443 135.122,5.793 135.122,6.493 152.922,24.293 152.922,69.186 167.273,83.537 178.829,83.537 180.112,84.82
  Top Layer w0.254: 104.974,82.229 117.737,94.992 177.559,94.992 ; 105.982,146.808 105.982,141.433 149.882,97.532 177.559,97.532 ; 107.514,82.229 119.033,93.748 178.854,93.748 180.099,94.992 ; 108.522,146.808 108.522,142.293 149.447,101.368 178.854,101.368 180.099,102.612 ; 113.602,146.808 113.602,139.713 150.702,102.612 177.559,102.612 ; 116.142,146.808 116.142,139.873 150.862,105.152 177.559,105.152 ; 118.682,146.808 118.682,140.333 142.382,116.633 178.88,116.633 180.099,117.852 ; 121.222,146.808 121.222,140.793 144.162,117.852 177.559,117.852 ; 123.762,146.808 123.762,140.853 144.222,120.392 177.559,120.392 ; 128.842,146.808 128.842,138.973 146.178,121.637 178.804,121.637 180.099,122.932 ; 131.382,146.808 131.382,139.733 146.938,124.177 178.804,124.177 180.099,125.472 ; 133.922,146.808 133.922,140.693 147.872,126.742 181.217,126.742 182.106,127.631 182.106,130.959 181.242,131.822 178.829,131.822 177.559,133.092 ; 136.462,146.808 136.462,142.053 150.502,128.012 177.559,128.012 ; 136.472,1.543 139.572,1.543 ; 136.472,3.493 137.622,3.493 139.572,1.543 ; 136.472,4.143 136.473,4.144 140.145,4.144 ; 136.472,6.093 137.422,6.093 138.736,4.779 139.561,4.779 140.145,4.195 140.145,4.144 ; 139.002,146.808 139.002,143.313 153.058,129.257 178.804,129.257 180.099,130.552 ; 140.145,6.43 143.752,6.43 148.122,6.43 148.298,6.606 148.509,6.606 149.822,5.293 149.822,3.293 148.072,1.543 139.572,1.543 ; 141.542,146.808 141.542,144.973 152.127,134.388 178.804,134.388 180.099,133.092 ; 148.298,4.106 140.183,4.106 140.145,4.144
  Top Layer w0.635: 176.797,33.73 179.922,30.605 179.922,10.716 178.677,9.47
  Bottom Layer w0.635: 108.166,141.949 110.706,141.949 111.062,141.594 ; 108.166,144.235 108.522,144.591 108.522,146.808 ; 111.062,146.808 111.062,141.594 ; 111.08,141.576 111.062,141.594 ; 116.142,146.808 116.269,146.681 116.269,144.261 ; 116.269,141.975 116.222,141.928 116.222,137.193 120.322,133.093 ; 125.294,82.229 125.294,81.995 124.785,81.486 124.785,78.736 124.785,67.229 128.27,63.745 134.735,63.745 141.034,63.745 148.37,63.745 174.022,38.093 174.022,32.287 176.797,29.512 ; 126.302,144.098 126.302,146.808 ; 127.834,82.229 127.844,82.219 127.844,78.736 127.844,75.866 127.844,74.271 129.15,72.965 134.862,72.965 140.958,72.965 141.146,72.777 142.338,72.777 179.922,35.193 179.922,28.419 176.797,25.295 ; 132.278,93.494 132.278,85.442 132.329,85.442 132.723,85.048 132.723,84.997 132.914,84.806 132.914,82.229 ; 135.141,85.485 135.454,85.172 135.454,82.229 ; 137.994,82.229 138.029,82.264 138.029,85.416 138.029,93.951 ; 148.298,4.106 155.985,11.793 169.122,11.793 174.022,6.893 179.822,6.893 182.422,9.493 182.422,46.62 176.797,52.245 ; 176.797,48.028 174.222,50.603 174.222,130.693 171.822,133.093 120.322,133.093 ; 111.062,141.594 111.062,136.353 114.322,133.093 120.322,133.093

## Polygon pours and split planes (outlines as drawn)
GND on Bottom Layer "Top Overlay-No Net" (solid, remove dead copper, pour order 0): 0,150 185,150 185,0 0,0
GND on Top Layer "Top Overlay-No Net" (solid, remove dead copper, pour order 1): 0,150 185,150 185,0 0,0

## Keep-outs
Keep-Out Layer:
  the board outline again, w0.254

## Other copper
Multi-Layer:
  pour cut-out: 28,10 28,0 18,0 18,10
  pour cut-out: 168,10 168,0 158,0 158,10
  pour cut-out: 168,150 168,140 158,140 158,150
  pour cut-out: 28,150 28,140 18,140 18,150

## Silkscreen, mask and mechanical layers (free items; w line width, h text height)
Top Overlay:
  lines w0.254: 92.481,0 92.481,149.987
  text "+" at 11.202,145.568 h1.52
  text "IMX425LLJ / Channel B" at 155.197,107.214 h1.52
  text "IMX425LLJ / Channel A" at 10.925,39.066 h1.52
  text "+" at 173.52,5.025 h1.52 r180

## Text inside footprints (layer, text, board x,y; h text height)
C5: Bottom Overlay "-" at 43.129,73.567 h1.52 r180
C5_1: Bottom Overlay "-" at 141.592,77.026 h1.52
C6: Bottom Overlay "-" at 49.252,74.14 h1.52 r180
C6_1: Bottom Overlay "-" at 135.469,76.453 h1.52
C16: Bottom Overlay "-" at 49.379,83.36 h1.52 r180
C16_1: Bottom Overlay "-" at 135.342,67.233 h1.52
C17: Bottom Overlay "-" at 43.08,83.36 h1.52 r180
C17_1: Bottom Overlay "-" at 141.642,67.233 h1.52
C21: Bottom Overlay "-" at 35.816,142.999 h1.52 r180
C21_1: Bottom Overlay "-" at 148.906,7.594 h1.52
X1: Top Overlay "TOUT2" at 43.756,5.881 h1.52 r90; Top Overlay "TOUT1" at 46.307,5.881 h1.52 r90; Top Overlay "TOUT0" at 48.858,5.881 h1.52 r90; Top Overlay "XMASTER" at 51.409,5.881 h1.52 r90; Top Overlay "XCLR" at 53.96,5.881 h1.52 r90; Top Overlay "SDI" at 56.51,5.881 h1.52 r90; Top Overlay "SLAMODE" at 59.061,5.881 h1.52 r90; Top Overlay "OMODE" at 61.612,5.881 h1.52 r90; Top Overlay "SCK" at 64.163,5.881 h1.52 r90; Top Overlay "XCE" at 66.714,5.881 h1.52 r90; Top Overlay "XVS" at 69.265,5.881 h1.52 r90; Top Overlay "SDO" at 71.816,5.881 h1.52 r90; Top Overlay "OVDD" at 74.367,5.881 h1.52 r90; Top Overlay "XHS" at 76.917,5.881 h1.52 r90; Top Overlay "INCK" at 79.468,5.881 h1.52 r90; Top Overlay "VCP1" at 47.414,61.481 h1.52 r90; Top Overlay "VBGR" at 49.979,60.974 h1.52 r90; Top Overlay "VCP2" at 52.621,60.974 h1.52 r90; Top Overlay "GND" at 55.059,62.497 h1.52 r90; Top Overlay "AVDD" at 57.624,60.974 h1.52 r90; Top Overlay "DVDD" at 60.139,60.974 h1.52 r90; Top Overlay "DO4_N" at 62.704,59.45 h1.52 r90; Top Overlay "DO4_P" at 65.168,59.45 h1.52 r90; Top Overlay "DCK_N" at 67.712,59.45 h1.52 r90; Top Overlay "DCK_P" at 70.223,59.45 h1.52 r90; Top Overlay "DO3_N" at 72.814,59.45 h1.52 r90; Top Overlay "DO3_P" at 75.404,59.45 h1.52 r90; Top Overlay "XTRIG2" at 77.97,58.18 h1.52 r90; Top Overlay "XTRIG1" at 80.484,58.688 h1.52 r90; Top Overlay "GND" at 83.126,62.497 h1.52 r90
X1_1: Top Overlay "TOUT2" at 142.392,137.72 h1.52 r90; Top Overlay "TOUT1" at 139.954,138.126 h1.52 r90; Top Overlay "TOUT0" at 137.388,137.602 h1.52 r90; Top Overlay "XMASTER" at 134.837,134.555 h1.52 r90; Top Overlay "XCLR" at 132.286,139.126 h1.52 r90; Top Overlay "SDI" at 129.718,141.148 h1.52 r90; Top Overlay "SLAMODE" at 127.184,134.555 h1.52 r90; Top Overlay "OMODE" at 124.633,137.602 h1.52 r90; Top Overlay "SCK" at 122.082,140.649 h1.52 r90; Top Overlay "XCE" at 119.531,140.649 h1.52 r90; Top Overlay "XVS" at 116.98,140.649 h1.52 r90; Top Overlay "SDO" at 114.43,140.649 h1.52 r90; Top Overlay "OVDD" at 111.879,139.126 h1.52 r90; Top Overlay "XHS" at 109.328,140.649 h1.52 r90; Top Overlay "INCK" at 106.777,139.379 h1.52 r90; Top Overlay "VCP1" at 138.832,84.033 h1.52 r90; Top Overlay "VBGR" at 136.266,84.033 h1.52 r90; Top Overlay "VCP2" at 133.625,84.033 h1.52 r90; Top Overlay "GND" at 131.186,84.033 h1.52 r90; Top Overlay "AVDD" at 128.621,84.033 h1.52 r90; Top Overlay "DVDD" at 126.106,84.033 h1.52 r90; Top Overlay "DO4_N" at 123.287,84.033 h1.52 r90; Top Overlay "DO4_P" at 120.823,84.033 h1.52 r90; Top Overlay "DCK_N" at 118.28,84.033 h1.52 r90; Top Overlay "DCK_P" at 115.769,84.033 h1.52 r90; Top Overlay "DO3_N" at 113.178,84.033 h1.52 r90; Top Overlay "DO3_P" at 110.587,84.033 h1.52 r90; Top Overlay "XTRIG2" at 108.276,84.033 h1.52 r90; Top Overlay "XTRIG1" at 105.761,84.033 h1.52 r90; Top Overlay "GND" at 103.119,84.033 h1.52 r90
X2: Top Overlay "Ухо" at 4.339,80.669 h2.52; Top Overlay "Ухо" at 4.339,3.569 h2.52
X2_1: Top Overlay "Ухо" at 177.471,68.279 h2.52; Top Overlay "Ухо" at 177.471,145.379 h2.52